# Altium PCB pcbV2.PcbDoc
Units mm, origin at the board's own origin, x right, y up, seen from the top; angles counter-clockwise.
Board outline 45.82 x 59.92 mm, 2 copper layers (Top Layer, Bottom Layer); 7 components, 0 nets, 22 pads, 0 vias.
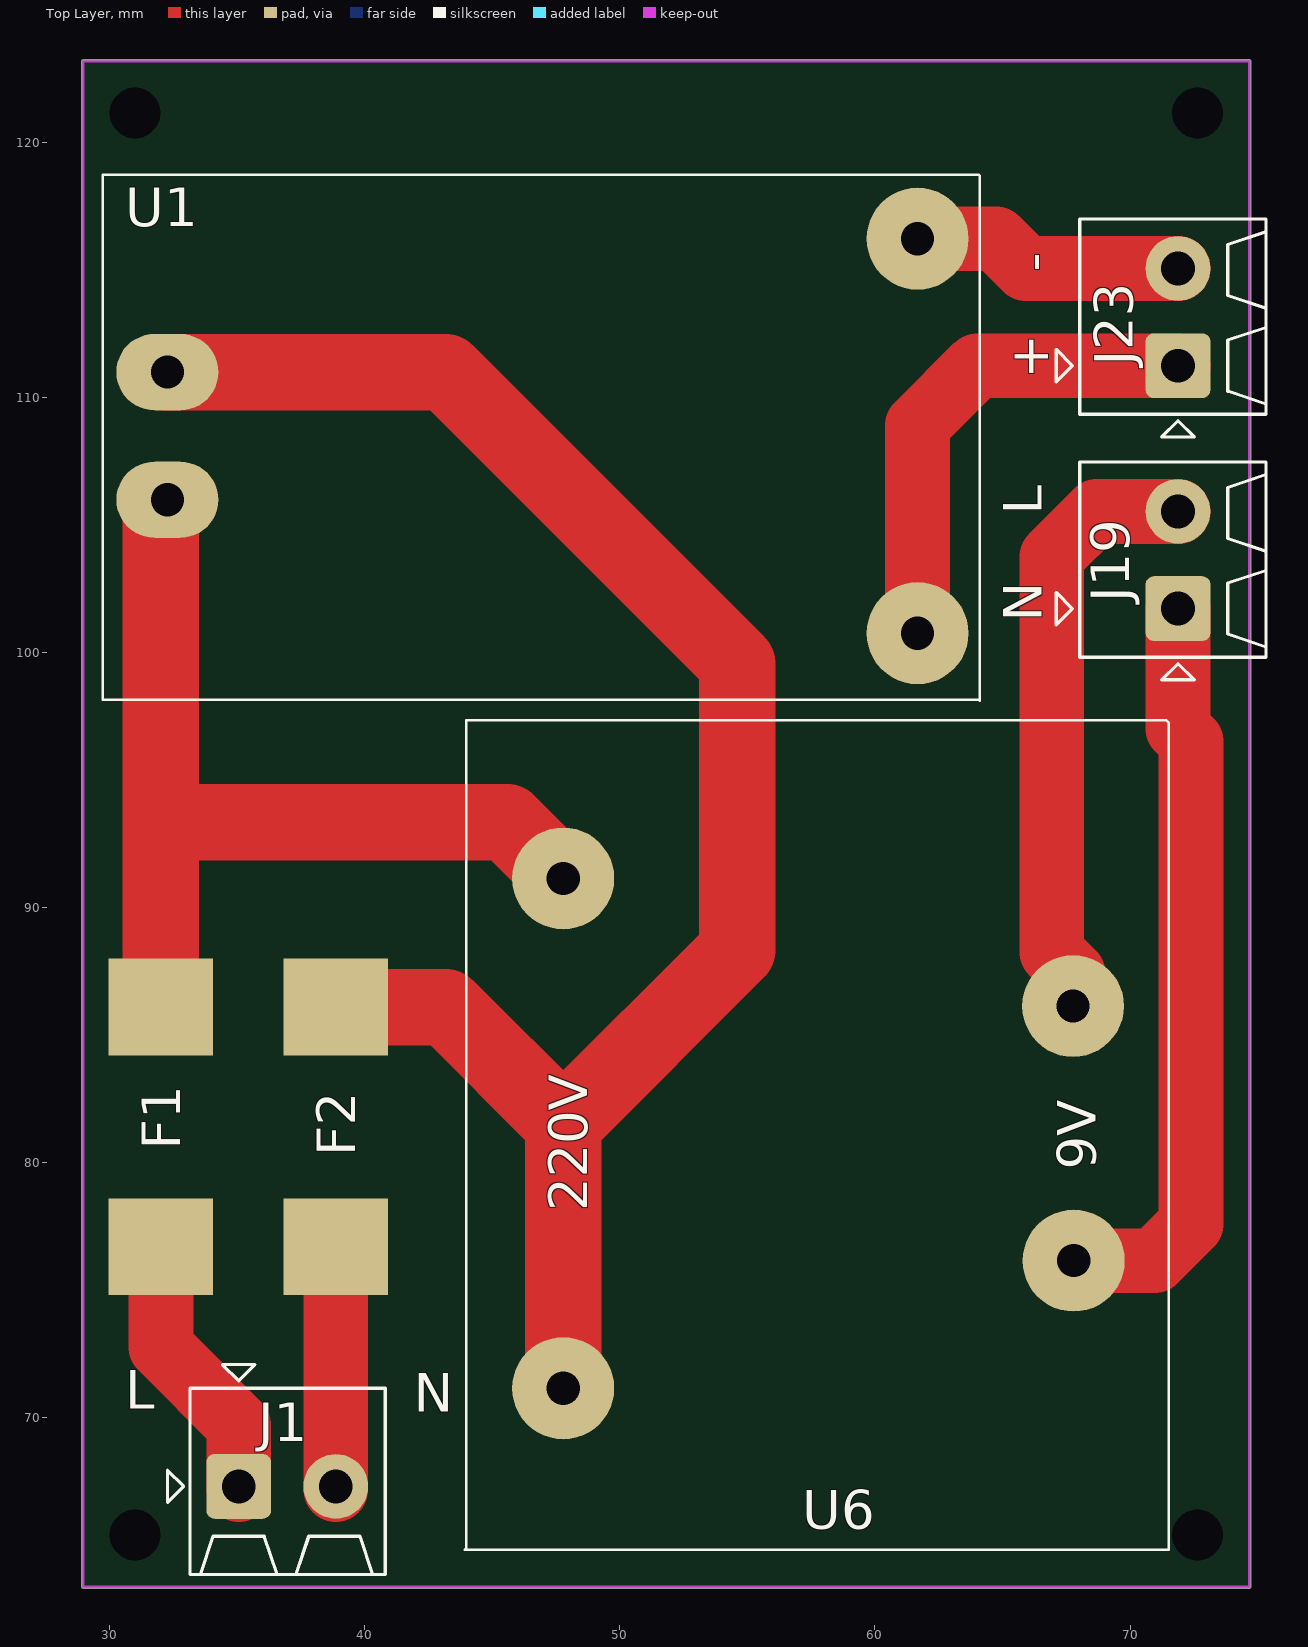
[diagram p0: Top Layer view]
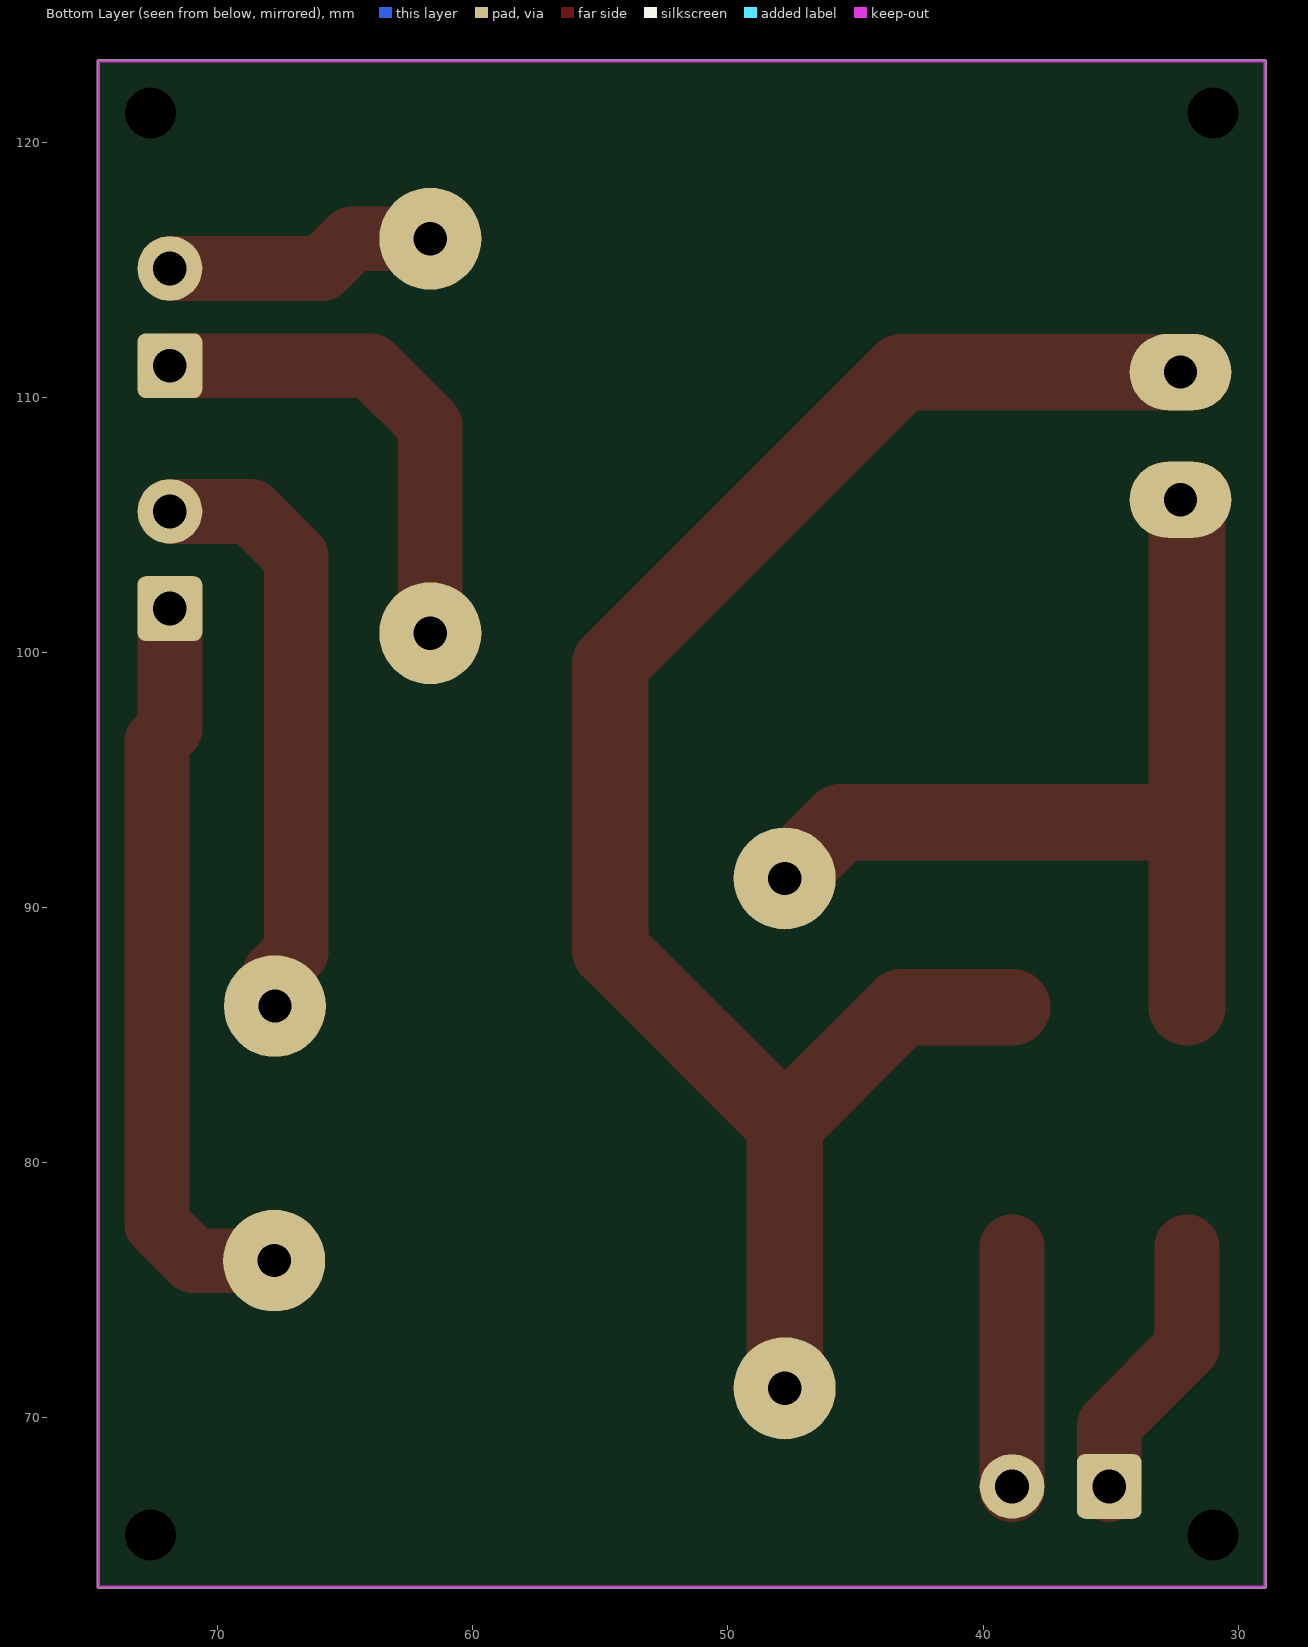
[diagram p1: Bottom Layer view, seen from below]

## Layer stack, top to bottom
Top Solder: solder mask 0.0102, Solder Resist, Dk 3.5
Top Layer: signal copper 0.0356
Dielectric 1: dielectric 0.32, FR-4, Dk 4.8
Bottom Layer: signal copper 0.0356
Bottom Solder: solder mask 0.0102, Solder Resist, Dk 3.5

## Board outline
28.956,63.323 cw(c28.956,63.373) 28.906,63.373 28.906,123.19 cw(c28.956,123.19) 28.956,123.24 74.676,123.24 cw(c74.676,123.19) 74.726,123.19 74.726,63.373 cw(c74.676,63.373) 74.676,63.323

## Design rules (kind name [scope] priority, off if disabled: settings)
Clearance [All] p1: gap=0.254
PolygonConnect [All] p1: connectstyle=Relief reliefconductorwidth=0.254 reliefentries=4 polygonreliefangle="90 Angle" airgapwidth=0.254
RoutingVias [All] p1: holewidth=0.711 width=1.27 viastyle="Through Hole" minholewidth=0.711 minwidth=1.27 maxholewidth=0.711 maxwidth=1.27
SolderMaskExpansion [All] p1: expansion=0.102
Width [All] p1: maxlimit=3 minlimit=0.254 preferedwidth=0.254
30 further rules are at their usual default settings.

## Components (designator, comment, footprint, x,y, rotation, side; value= is the part's Value field where it differs from the comment)
F1 "Slow-blow" "FUSES 20A 250VAC" 32.004,76.708 r90 top
F2 "Slow-blow" "FUSES 20A 250VAC" 38.862,76.708 r90 top
J1 "230V" 2P_PCB_ScrewTerm_90S_3.81MM 35.052,67.31 r270 top
J19 "9V" 2P_PCB_ScrewTerm_90S_3.81MM 71.882,101.727 r0 top
J23 "3.3V" 2P_PCB_ScrewTerm_90S_3.81MM 71.882,111.252 r0 top
U1 "HLK-PM03" HLK-PM03 32.258,110.998 r0 top
U6 "220V to 9V" "TRAFO 220-9" 57.785,81.153 r0 top

## Footprints (in the part's own frame and the unit in brackets; to place one, negate y for a bottom-side part, rotate by r counter-clockwise, add the part's x,y. Pads: shape width x height; smd on the part's side, far side on the other; paste and mask are expansions set on the pad)
2P_PCB_ScrewTerm_90S_3.81MM [mil] "TERM BLOCK 2POS SIDE ENT STACKABLE 3.81MM"
  rrect25% 100x100 hole 52: 1(0,0)
  round 100 hole 52: 2(0,150)
  silkscreen extent -188,-110 136,226, body extent -152,-75 136,225, height 335
"FUSES 20A 250VAC" [mm]
  rect 3.8x4.1 smd: 1(0,0) 2(9.398,0)
  body extent -0.33,-1.63 9.67,1.52, height 3.15
HLK-PM03 [mm]
  oval 4x3 hole 1.3: 1(0,-5.004) 2(0,0)
  round 4 hole 1.3: 3(29.413,5.232) 4(29.413,-10.236)
  silkscreen extent -2.54,-12.88 31.85,7.75, body extent -2.29,-12.67 31.71,7.53, height 15.6
"TRAFO 220-9" [mm]
  round 4 hole 1.3: 1(-10.008,9.995) 2(-10.008,-9.995) 3(9.982,4.991) 4(10.008,-4.991)
  silkscreen extent -13.87,-16.32 13.74,16.19, body extent -13.78,-16.29 13.72,16.21, height 4.5

## Part data
F1 F2: library part FUSE_160mA_0603, "Fuse 160mA 63VDC 0603 SMD"
J1 J19 J23: library part 2P_ScrewTerm_90S_3.81MM, "Terminal Block Screw Type THT 2-Position 3.81mm pitch"
U1: "AC 220V to DC 3.3V"
U6: library part "TRANSFOR 220V-9V", "BV EI 304 2041"

## Free pads (board coordinates)
  round 0 hole 2: 0(30.988,65.405) 0(30.988,121.158) 0(72.644,65.405) 0(72.644,121.158)

## Nets (pads, with @x,y where several pads share a name; then routed paths per layer and width w, separated by ;. In a path a pad name is that pad's centre, name@x,y a point inside that pad or via, vN(x,y) a via of type N, cw(c..) or ccw(c..) an arc to the next point about the centre after c; other vN are vias at no path point)
pads on no net: F1.1 F1.2 F2.1 F2.2 J1.1 J1.2 J19.1 J19.2 J23.1 J23.2 U1.1 U1.2 U1.3 U1.4 U6.1 U6.2 U6.3 U6.4
copper on no net: | length 209.3
  Top Layer w2.54: 32.004,76.708 32.004,72.771 35.052,69.723 35.052,67.183 ; 32.004,105.74 32.258,105.994 ; 38.862,67.183 38.862,76.708 ; 61.671,100.762 61.671,108.915 64.008,111.252 71.882,111.252 ; 61.671,116.23 64.745,116.23 65.913,115.062 71.882,115.062 ; 67.767,86.144 67.767,87.427 66.929,88.265 66.929,103.759 68.707,105.537 71.882,105.537 ; 67.793,76.162 70.955,76.162 72.39,77.597 72.39,96.52 71.882,97.028 71.882,101.727
  Top Layer w3: 32.004,86.106 32.004,93.345 ; 32.004,105.74 32.004,93.345 ; 32.258,110.998 43.18,110.998 54.61,99.568 54.61,88.341 47.777,81.509 ; 38.862,86.106 43.18,86.106 47.777,81.509 ; 47.777,71.158 47.777,81.509 ; 47.777,91.148 45.58,93.345 32.004,93.345

## Keep-outs
Keep-Out Layer:
  lines w0.1: 74.676,67.437 74.676,123.19 28.956,123.19 28.956,115.697 28.956,63.373 74.676,63.373 74.676,67.691

## Silkscreen, mask and mechanical layers (free items; w line width, h text height)
Top Overlay:
  text "-" at 66.929,114.935 h1.52 r90
  text "+" at 66.802,110.744 h1.52 r90
  text "L" at 66.548,105.41 h1.52 r90
  text "N" at 66.548,101.219 h1.52 r90
  text "L" at 30.607,70.358 h1.52
  text "N" at 41.91,70.231 h1.52

## Text inside footprints (layer, text, board x,y; h text height)
U6: Top Overlay "9V" at 68.656,79.731 h1.52 r90; Top Overlay "220V" at 48.717,78.105 h1.52 r90